# Altium PCB 3 motors 1 board.PcbDoc (part 2 of 2)
Units mil, origin at the board's own origin, x right, y up, seen from the top; angles counter-clockwise.
Board outline 3920 x 3290 mil, 4 copper layers (Top Layer, GND, PWR, Bottom Layer), stack 37.817 mil thick; 72 components, 81 nets, 316 pads, 112 vias.
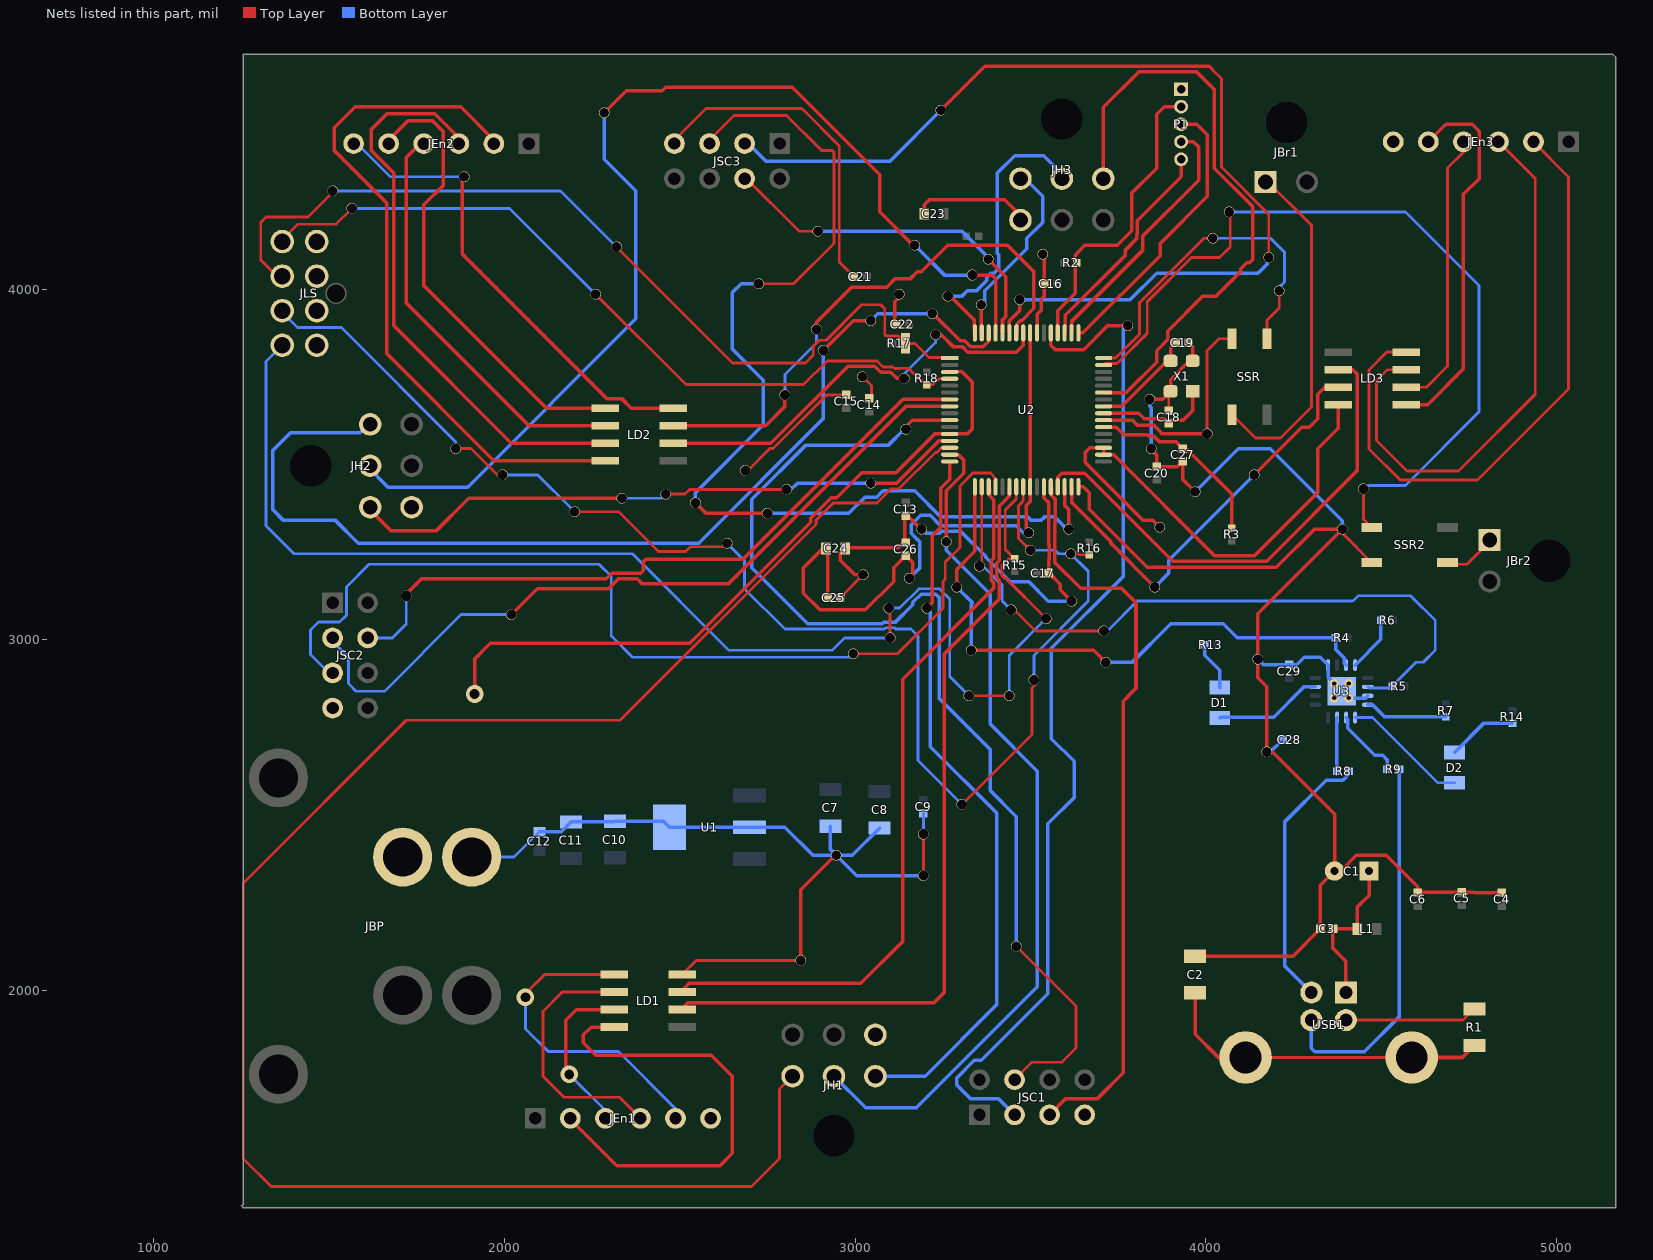
[diagram p4: the nets of this part, all layers, seen from the top]

## Via types
v1: diameter 30, hole 28, Top Layer to Bottom Layer, 107 vias
v2: diameter 50, hole 28, Top Layer to Bottom Layer, 4 vias
v3: diameter 30, hole 30, Top Layer to Bottom Layer, 1 vias

## Nets (pads, with @x,y where several pads share a name; then routed paths per layer and width w, separated by ;. In a path a pad name is that pad's centre, name@x,y a point inside that pad or via, vN(x,y) a via of type N, cw(c..) or ccw(c..) an arc to the next point about the centre after c; other vN are vias at no path point) (continued)
CF2M1: JSC1.3 U2.53 | length 2906
  Top Layer w10: U2.53@3558.39,3875 3558.39,3840.04 3571.57,3826.85 3651.85,3826.85 3720.86,3895.86 v1(3777.65,3895.86)
  Bottom Layer w10: JSC1.3@3455,1645 3410,1690 3330,1690 3290,1730 3290,1750 3340,1800 3360,1800 3550,1990 3550,2474.71 3625,2549.71 3625,2572.98 3624.77,2573.21 3624.77,2606.79 3625,2607.02 3625,2652.72 3560,2717.72 3560,2975 3765,3180 3765,3885
CF2M2: JSC2.3 U2.8 | length 2224.7
  Top Layer w10: v1(2019.87,3071.34) 2093.53,3145 2296.81,3145 2325.28,3173.47 2378.41,3173.47 2391.89,3160 2640,3160 3145,3665 U2.8@3270,3665
  Bottom Layer w8: JSC2.3@1500,3005 1555,2950 1555,2875 1577.33,2852.67 1657.67,2852.67 1876.34,3071.34 v1(2019.87,3071.34)
CF2M3: JSC3.3 U2.59 | length 2930.4
  Top Layer w8: 4020,4625 4045,4600 4045,4347.57 4180,4212.57 v1(4180,4090)
  Top Layer w10: v1(3245,4510) 3370,4635 4010,4635 4020,4625 ; U2.59@3440.28,3875 3440.28,3908.91 3470,3938.63 v1(3470,3970)
  Bottom Layer w10: JSC3.3@2685,4425 2745,4365 3100,4365 v1(3245,4510) ; v1@3480,3970 3785,3970 3860,4045 4149.21,4045 4175,4070.79 v1@4175,4080
CF3M1: JSC1.4 U2.10 | length 3186.1
  Top Layer w8: JSC1.4@3455,1745 3505,1795 3590,1795 3630,1835 3630,1955 v1(3460,2125)
  Top Layer w10: v1(3145,3600) 3155,3600 3150,3605 3146.3,3608.7 3163.58,3625.98 U2.10@3270,3625.98
  Bottom Layer w10: v1(3145,3600) 3145,3590 3140,3595 3137.8,3597.2 3095.6,3555 2860,3555 2705,3400 2705,3205 2865,3045 3077.77,3045 3081.77,3049 3114,3049 3165,3100 3165,3106.57 3188.43,3130 3230,3130 3240.84,3119.16 3240.84,2831.37 3385.47,2686.73 3385.47,2569.82 3460,2495.29 v1(3460,2125)
CF3M2: JSC2.4 U2.7 | length 2016
  Top Layer w10: v3@1717.5,3127.5 1763.47,3173.47 2290.49,3173.47 2306.49,3189.47 2385.04,3189.47 2386.78,3187.73 2395.53,3196.48 2395.53,3221.34 2404.18,3230 2681.37,3230 3136.37,3685 3175,3685 ; 3175.04,3685.04 U2.7@3270,3685.04
  Bottom Layer w8: JSC2.4@1600,3005 1680,3005 1720,3045 v3(1720,3125)
CF3M3: JSC3.4 U2.60 | length 1014.3
  Top Layer w8: JSC3.4@2682.5,4322.5 2840,4165 v1(2894.2,4165)
  Top Layer w10: v1(3380,4085) 3430,4035 3430,3921.26 3420.59,3911.85 U2.60@3420.59,3875
  Bottom Layer w10: v1(2894.2,4165) 3305,4165 3370,4100
CLK1_A: JEn1.4 LD1.6 | length 738.5
  Top Layer w8: LD1.6@2313,1995 2165,1995 2110,1940 2110,1755 2170,1695 2328,1695 JEn1.4@2388,1635
CLK1_B: JEn2.4 LD2.6 | length 1198.7
  Top Layer w10: JEn2.4@1770,4425 1720,4375 1720,3960 2070,3610 LD2.6@2288,3610
CLK1_C: JEn3.4 LD3.6 | length 801.5
  Top Layer w8: LD3.6@4572,3720 4630,3720 4690,3780 4690,4345 4735,4390 JEn3.4@4735,4420
CLK2_A: JEn1.5 LD1.5 | length 922.3
  Top Layer w8: v2@2055,1985 2115,2045 LD1.5@2313,2045
  Bottom Layer w8: v2(2060,1980) 2060,1890 2125,1825 2325,1825 2488,1662 JEn1.5@2488,1635
CLK2_B: JEn2.5 LD2.5 | length 1316
  Top Layer w10: JEn2.5@1670,4425 1725,4480 1795,4480 1825,4450 1825,4295 1770,4240 1770,4010 2120,3660 LD2.5@2288,3660
CLK2_C: JEn3.5 LD3.5 | length 1075.9
  Top Layer w10: LD3.5@4572,3670 4633.04,3670 4735,3771.96 4735,4270 4780,4315 4780,4450 4760,4470 4685,4470 JEn3.5@4635,4420
CLK_A: LD1.3 U2.19 | length 2102.3
  Top Layer w10: LD1.3@2507,2000 2527,2020 3016.63,2020 3135.81,2139.19 3135.81,2887.53 3395,3146.72 3395,3162.92 3388.45,3169.47 3388.45,3225.09 3395,3231.64 3395,3399.32 3384,3410.32 3384,3432.02 U2.19@3380,3436.02
CLK_B: LD2.3 U2.58 | length 1542.5
  Top Layer w10: LD2.3@2482,3610 2745,3610 2800,3665 2800,3682.26 ; v1(2890,3885) 2890,3905 2990,4005 3090,4005 3115,4030 3158.1,4030 3177.42,4049.32 3188.64,4049.32 3264.32,4125 3435,4125 3510,4050 3510,3945 3475,3910 3470.98,3910 3470.98,3908.95 3462.74,3900.7 3462.74,3877.78 U2.58@3459.96,3875
  Bottom Layer w8: v1(2800,3698.11) 2800,3756.01 2890,3846.01 v1(2890,3885)
CLK_C: LD3.3 U2.31 | length 1212.8
  Top Layer w10: U2.31@3617.44,3436.02 3617.44,3391.89 3730,3279.33 3730,3275 v1(3855,3150) ; v1(4138.5,3470) 4274.5,3606 4295.71,3606 4320,3630.29 4320,3700 4340,3720 LD3.3@4378,3720
  Bottom Layer w8: v1@3850,3145 v1(3855,3150)
  Bottom Layer w10: v1(3855,3150) 3895,3190 3895,3226.5 v1(4138.5,3470)
DATA1_A: JEn1.2 LD1.8 | length 1337.7
  Top Layer w10: JEn1.2@2186.5,1633.5 2320,1500 2615,1500 2650,1535 2650,1755 2590,1815 2260,1815 2225,1850 2225,1872.83 2247.17,1895 LD1.8@2313,1895
DATA1_B: JEn2.2 LD2.8 | length 1975.7
  Top Layer w10: JEn2.2@1970,4425 1875,4520 1575,4520 1515,4460 1515,4395 1665,4245 1665,3815 1970,3510 LD2.8@2288,3510
DATA1_C: JEn3.2 LD3.8 | length 1812.3
  Top Layer w8: LD3.8@4572,3820 4516.54,3820 4466.1,3769.57 4466.1,3543.9 4555,3455 4775,3455 5035,3715 5035,4320 JEn3.2@4935,4420
DATA2_A: JEn1.3 LD1.7 | length 473.1
  Top Layer w10: v2@2175,1760 2175,1915 2205,1945 LD1.7@2313,1945
  Bottom Layer w8: v2(2185,1760) 2288,1657 JEn1.3@2288,1635
DATA2_B: JEn2.3 LD2.7 | length 1628
  Top Layer w10: JEn2.3@1871.56,4429.69 1801.25,4500 1665,4500 1620,4455 1620,4395 1685,4330 1685,3895 2020,3560 LD2.7@2288,3560
DATA2_C: JEn3.3 LD3.7 | length 1611.6
  Top Layer w8: LD3.7@4572,3770 4518.71,3770 4487.01,3738.3 4487.01,3567.99 4573.9,3481.1 4721.1,3481.1 4940,3700 4940,4315 JEn3.3@4835,4420
DATA_A: LD1.2 U2.22 | length 2291.7
  Top Layer w10: LD1.2@2507,1947.17 2524.83,1965 3225.67,1965 3254.41,1993.74 3255,1993.74 3255,2960 3411,3116 3411,3169.55 3404.45,3176.1 3404.45,3218.47 3411,3225.02 3411,3380.45 3440.28,3409.72 U2.22@3440.28,3436.02
DATA_B: LD2.2 U2.57 | length 1239.6
  Top Layer w10: LD2.2@2482,3560 2760,3560 2980,3780 3056.25,3780 3073.54,3762.72 3102.28,3762.72 3120,3745 v1(3140,3745) ; v1(3230,3870) 3245.46,3870 3279.4,3836.06 3305.79,3836.06 3321.81,3820.04 3450.04,3820.04 3450,3820 3459.65,3820 3479.65,3840 U2.57@3479.65,3875
  Bottom Layer w8: v1(3140,3745) 3140,3757.48 3230,3847.48 v1(3230,3870)
DATA_C: LD3.2 U2.29 | length 1432.1
  Top Layer w10: U2.29@3578.07,3436.02 3578.07,3463.07 3590,3475 3655,3475 3905,3225 3906,3224 4174,3224 4432.44,3482.44 4432.44,3757.56 4420,3770 LD3.2@4378,3770
DM: R8.1 USB1.2 | length 767.4
  Bottom Layer w10: USB1.2@4301.57,1993.74 4225,2070.32 4225,2480 4344.17,2599.17 4391.61,2599.17 4410,2617.57 R8.1@4410,2625
DP: R9.1 USB1.3 | length 1081.6
  Bottom Layer w10: USB1.3@4301.57,1915 4301.57,1835 4311.57,1825 4452.59,1825 4552.72,1925.12 R9.1@4552.72,2630
GND: C1.2 C2.1 C3.1 C4.1 C5.1 C6.1 C7.2 C8.2 C9.1 C10.2 C11.2 C12.2 C13.1 C14.1 C15.1 C16.1 C17.1 C18.1 C19.1 C20.1 C21.1 C22.1 C23.1 C24.1 C25.1 C26.1 C27.1 C28.1 C29.1 JBP.3 JBP.4 JEn1.6 JEn2.6 JEn3.6 JH1.4 JH2.4 JH3.4 JLS.1 JLS.2 JLS.3 JLS.4 JSC1.7 JSC2.7 JSC3.7 LD1.4 LD2.4 LD3.4 P1.1 R1.1 SSR2.2 SSR.2 U1.2 U1.4 U2.3 U2.12 U2.27 U2.32 U2.34 U2.35 U2.39 U2.55 U3.3 U3.13 U3.17 USB1.4 X1.2 X1.4 | length 16838.5
  Top Layer w8: JSC3.7@2485,4425 2575,4515 2848.25,4515 2955,4408.25 2955,4076.89 C21.1@2996.89,4035 ; LD1.4@2507,2045 2547,2085 v1(2845,2085) ; v1(2687.27,3482.88) 2694.53,3482.88 2756.65,3545 2766.21,3545 2919.32,3698.11 C15.1@2975,3698.11 ; C25.1@2958.11,3120 v1(3023.11,3185) ; C24.1@2972.56,3260 C24.1@2972.56,3262.2 ; v1(3021.03,3750) 3046.56,3724.47 3046.56,3694.67 C14.1@3040,3688.11 ; v1@3125.84,3975.89 v1(3125.84,3985) ; C13.1@3142.28,3350.12 C13.1@3152.76,3350.12 ; v1@3187.38,3315.5 v1(3190.25,3315.5) ; v1(3195.25,2327.06) v1(3195.25,2445.46) ; v1(3535.14,4099.07) v1@3540.28,4093.93 ; 3540,4054.72 3540.28,4055 ; U2.34@3708.98,3527.56 U2.34@3709.95,3526.59 ; C18.1@3895,3653.11 3895,3703.39 X1.4@3900,3708.39 ; v1(4004.1,3586.61) 4004.1,3824.1 4038.27,3858.27 SSR.2@4075,3858.27 ; v1(4174.03,2680) 4190,2680 ; v1(4390,3315) 4390,3303.46 SSR2.2@4473.46,3220 ; USB1.4@4400,1915 4734.06,1915 R1.1@4766.22,1947.17 ; C6.1@4605,2278.11 C6.1@4606.89,2280
  Top Layer w10: v1@1880,4320 1880,4100 2292.31,3687.69 2333.99,3687.69 2361.68,3660 LD2.4@2482,3660 ; v2(1915,2845) 1915,2945 1959.47,2989.47 2526.98,2989.47 2528.34,2990.84 ; 2529.05,2990.13 2873.66,3334.74 2873.66,3346.59 2931.76,3404.69 2947.88,3404.69 3019.19,3476 3031.92,3476 3032.57,3476.65 3057.43,3476.65 3058.08,3476 3116.81,3476 3227.43,3586.61 U2.12@3270,3586.61 3320.27,3586.61 3335,3601.34 3335,3733.7 3304.92,3763.78 U2.3@3270,3763.78 ; v1(2845,2085) 2845,2286.34 v1@2941.83,2383.17 ; C24.1@2972.56,3260 2958.11,3245.55 2958.11,3226.89 3000,3185 v1(3023.11,3185) ; C24.1@2972.56,3262.2 3123.33,3262.2 3142.28,3281.15 C13.1@3142.28,3350.12 ; C22.1@3113.78,3900 3113.78,3963.83 v1@3125.84,3975.89 ; C13.1@3152.76,3350.12 v1@3187.38,3315.5 ; C23.1@3197.44,4215 3197.44,4240.07 3212.37,4255 3426.89,4255 JH3.4@3480,4201.89 ; U2.55@3519.02,3875 3519.02,3927.94 3530.87,3939.79 3530.87,3970.67 3540,3979.8 3540,4054.72 ; U2.27@3538.7,3436.02 3538.7,3405 3553.11,3390.59 3553.11,3270.48 3553.5,3270.09 3553.5,3229.91 3553.11,3229.52 C17.1@3553.11,3190 3584.88,3158.23 3584.88,3142.59 v1(3617.47,3110) ; 3540.28,4055 v1@3540.28,4093.93 ; U2.32@3637.13,3436.02 3650.53,3436.02 3667.85,3418.71 3667.85,3372.22 3833.55,3206.52 4201.86,3206.52 4310.34,3315 v1(4390,3315) 4149.07,3074.07 v1(4149.07,2943.89) 4149.07,2891.08 4174,2866.15 v1(4174.03,2680) ; U2.39@3708.98,3625.98 3791.54,3625.98 3805.42,3612.1 3851.89,3612.1 3873.38,3590.61 ; v1(3840,3685) 3876.61,3685 X1.4@3895,3703.39 ; v1@3849.19,3537.4 3860,3526.59 C20.1@3860,3493.11 3919.33,3493.11 C27.1@3935,3508.78 3935,3456.69 v1(3970,3421.69) ; v1(3869.02,3320.5) 3849.14,3340.38 3821.2,3340.38 3656.18,3505.39 3656.18,3533.9 3669.53,3547.24 U2.35@3708.98,3547.24 U2.34@3708.98,3527.56 3737.44,3527.56 4025,3240 4140.15,3240 4319.71,3419.56 4319.71,3544.71 4378,3603 LD3.4@4378,3670 ; 3872.8,3590.03 3876.21,3586.61 v1(4004.1,3586.61) ; X1.4@3900,3708.39 3900,3741.69 3953.31,3795 X1.2@3962.99,3795 3962.99,3835.62 C19.1@3951.22,3847.4 ; C2.1@3970,2097.17 4249.06,2097.17 C3.1@4326.89,2175 4326.89,2299.21 C1.2@4367.68,2340 ; 4190,2680 4367.68,2502.32 C1.2@4367.68,2340 ; C6.1@4605,2278.11 4605,2295 4515,2385 4430,2385 4385,2340 C1.2@4367.68,2340 ; C6.1@4606.89,2280 C5.1@4730,2280 4764.33,2280 4766.22,2278.11 C4.1@4845,2278.11
  Bottom Layer w8: JEn2.6@1570,4425 1675,4320 v1(1885,4320) ; JBP.3@1906.85,2380 2027.44,2380 C12.2@2100,2452.56 ; C10.2@2312.83,2480 C10.2@2315,2482.17 ; C9.1@3195,2505 3195,2455.25 v1@3195.25,2455 ; v1(3535.14,4099.07) 3537.09,4099.07 v1@3543.89,4105.86 ; v1@3835,3690 v1(3840,3685) ; v1(4174.03,2680) v1@4185,2680
  Bottom Layer w10: C12.2@2100,2452.56 2162.56,2452.56 C11.2@2190,2480 C10.2@2312.83,2480 ; C10.2@2315,2482.17 2453.66,2482.17 U1.4@2470.83,2465 U1.2@2699.17,2465 2800,2465 2880,2385 v1(2946.61,2385) ; C7.2@2930,2467.83 2930,2401.61 v1(2946.61,2385) ; C8.2@3070,2462.83 2992.17,2385 v1(2946.61,2385) ; v1(3190.25,3315.5) 3202.19,3303.55 3241.79,3303.55 3247.57,3309.33 3300.67,3309.33 3372.43,3237.57 3372.43,3235 3442.43,3165 3496.15,3165 3551.15,3110 v1(3617.47,3110) ; v1(3195.25,2327.06) 3004.55,2327.06 v1(2946.61,2385) ; v1(3840,3685) 3840,3666.85 3845,3661.85 v1(3845,3545) ; v1(3970,3421.69) 4093.31,3545 4184.6,3545 4390,3339.6 v1(4390,3315) ; v1(4149.07,2943.89) 4164.86,2928.11 C29.1@4238.11,2928.11 4259.6,2928.11 4281.25,2949.77 4327.11,2949.77 U3.13@4349.4,2927.47 4349.4,2892.21 U3.17@4366.61,2875 ; v1@4185,2680 C28.1@4220,2715 ; U3.17@4408.11,2833.27 4455.99,2833.27 U3.3@4462.59,2839.87
H1M1: JH1.3 U2.16 | length 2087.9
  Top Layer w10: v1(3205,3090) 3220.29,3105.29 3220.29,3262.47 3220,3262.76 3220,3295.9 3244,3319.9 3244,3431.63 3270,3457.63 U2.16@3270,3506.65
  Bottom Layer w10: JH1.3@3058.11,1755.08 3200.08,1755.08 3404.39,1959.39 3404.39,2505.61 3215,2695 3215,3080 v1(3205,3090)
H1M2: JH2.3 U2.13 | length 1786
  Top Layer w8: v1(2460,3415) 2514.85,3415 2528.48,3428.63 v1(2804.93,3428.63)
  Top Layer w10: JH2.3@1610.08,3376.89 1676.97,3310 1805,3310 1898.55,3403.55 v1@2340.55,3403.55 ; v1(3045,3446.65) 3119.21,3446.65 3239.49,3566.93 U2.13@3270,3566.93
  Bottom Layer w8: v1(2335,3403.36) 2448.36,3403.36 v1(2460,3415)
  Bottom Layer w10: v1@2818.63,3428.63 2836.65,3446.65 v1(3045,3446.65)
H1M3: JH3.3 U2.63 | length 526.1
  Top Layer w10: U2.63@3360,3875 v1(3360,3955)
  Bottom Layer w10: v1@3370,3965 3370,3994.66 3490,4114.66 3490,4144.79 3535,4189.79 3535,4265 JH3.3@3480,4320
H2M1: JH1.2 U2.15 | length 2437.4
  Top Layer w10: v1(3260,3279.33) 3260,3425 3310,3475 3310,3512.5 3294.94,3527.56 U2.15@3270,3527.56
  Bottom Layer w10: JH1.2@2940,1755.08 3030.08,1665 3175,1665 3520,2010 3520,2625 3385.47,2759.53 3385.47,3129.53 3260,3255 v1(3260,3279.33)
H2M2: JH2.2 U2.61 | length 3189
  Top Layer w10: v1(2285,4502.57) 2347.43,4565 2449.85,4565 2459.85,4575 2821.21,4575 3070,4326.21 3070,4220 v1@3160,4130 ; v1(3335,4040) 3390,4040 3400.91,4029.09 U2.61@3400.91,3875
  Bottom Layer w10: JH2.2@1610,3493.11 1668.11,3435 1895,3435 2375,3915 2375,4280 2285,4370 v1(2285,4502.57) ; v1(3170,4125) 3255,4040 v1(3335,4040)
H2M3: JH3.2 U2.64 | length 839
  Top Layer w10: v1(3265,3980) 3271.85,3980 3340,3911.85 U2.64@3340,3875
  Bottom Layer w10: v1(3265,3980) 3305,3980 3320,3995 3346.57,3995 3375,4023.43 3375,4032.75 3387.25,4045 3396.44,4045 3410,4058.56 3410,4097.43 3405,4102.43 3405,4330 3455,4380 3538.11,4380 JH3.2@3598.11,4320 ; JH3.2@3600.31,4328.09 JH3.2@3604.07,4328.09
H3M1: JH1.1 U2.14 | length 5168.1
  Top Layer w8: JH1.1@2821.89,1755.08 2785,1718.19 2785,1520 2705,1440 1335,1440 1255,1520 1255,2305 1720,2770 2330.13,2770 2888.66,3328.53 2888.66,3340.38 2937.97,3389.69 3062.24,3389.69 3103.21,3430.65 3125.84,3430.65 3229.35,3534.17 3233.85,3534.17 3246.93,3547.24 U2.14@3270,3547.24
H3M2: JH2.1 U2.62 | length 3005
  Top Layer w10: v1(2910,3825) 2995,3910 v1(3045,3910) ; v1(3220,3930) 3222.44,3930 3300.39,3852.06 3312.42,3852.06 3328.43,3836.04 3366.19,3836.04 3381.22,3851.07 U2.62@3381.22,3875
  Bottom Layer w10: JH2.1@1610.08,3613.11 1586.97,3590 1390,3590 1340,3540 1340,3370 1370,3340 1518.43,3340 1583.43,3275 1715,3275 2554,3275 2910,3631 v1(2910,3825) ; v1(3045,3910) 3065,3930 v1(3220,3930)
H3M3: JH3.1 U2.43 | length 1728.3
  Top Layer w10: JH3.1@3708.11,4319.92 3708.11,4518.11 3809,4619 3975.1,4619 4025,4569.1 4025,4345 4135,4235 4135,4085 4125,4075 4117.57,4075 4100,4057.43 4100,4050 4030,3980 3991.73,3980 3891.8,3880.06 3891.8,3856.02 3860,3824.23 3860,3791.5 3773.22,3704.72 U2.43@3708.98,3704.72
NetD1_1: D1.1 R13.1 | length 139.4
  Bottom Layer w10: R13.1@3997.28,2985 3997.28,2955.43 4040,2912.72 D1.1@4040,2863.31
NetD2_1: D2.1 R14.1 | length 199.8
  Bottom Layer w10: D2.1@4710,2678.31 4793.98,2762.28 R14.1@4875,2762.28
NetJLS_5: 
NetJLS_6: 
NetJLS_7: 
NetJLS_8: 
NetR6_1: R6.1 U3.16 | length 157.9
  Bottom Layer w10: U3.16@4426.18,2927.47 4499.57,3000.86 R6.1@4499.57,3055
NetR7_1: R7.1 U3.4 | length 236.8
  Bottom Layer w10: U3.4@4462.59,2814.28 4475.72,2814.28 4510.43,2779.57 R7.1@4685,2779.57
NetR8_2: R8.2 U3.7 | length 153
  Bottom Layer w10: R8.2@4374.57,2625 4374.57,2777.44 U3.7@4375,2777.87
NetR9_2: R9.2 U3.6 | length 209.6
  Bottom Layer w10: U3.6@4400.59,2777.87 4405.27,2773.18 4405.27,2746.93 4482.2,2670 4505,2670 4517.28,2657.72 R9.2@4517.28,2630
NO1: JLS.8 R15.1 U2.23 | length 3906.8
  Top Layer w8: v1(3100,3005) 3100,3071.34 ; v1(3325,2839.87) v1(3439.87,2839.87) ; U2.23@3459.96,3436.02 3459.96,3401.09 3428.54,3369.67 3428.54,3256.93 R15.1@3455,3230.47 3437.67,3230.47 3419.45,3212.25 3419.45,3182.31 3425.31,3176.46 3428.54,3176.46 v1(3545,3060)
  Bottom Layer w8: JLS.8@1366.57,3840 1320,3793.43 1320,3325 1400,3245 2365,3245 2640.47,2969.53 2934.53,2969.53 2970,3005 v1(3100,3005) ; v1(3096.68,3090) 3127.22,3090 3182.22,3145 3240.84,3145 3270,3115.84 3270,2894.87 v1(3325,2839.87) ; v1(3439.87,2839.87) 3439.87,2954.87 v1(3545,3060)
NO2: JLS.7 R16.1 U2.24 | length 4035.9
  Top Layer w8: v1(1861.34,3545) 1905,3545 v1@1985,3465 ; v1(2200,3365) 2325,3365 2439,3251 2517.01,3251 2531.01,3265 v1@2635,3265 ; v1(3305,2530) 3505,2730 3505,2862.53 v1@3516.24,2873.76 ; U2.24@3479.65,3436.02 3479.65,3395.51 3466,3381.86 3466,3289 v1(3500,3255) ; v1(3615,3245) 3637.68,3245 3640.39,3242.28 R16.1@3667.72,3242.28
  Bottom Layer w8: JLS.7@1364.07,3935.93 1410,3890 1535,3890 1861.34,3563.66 v1(1861.34,3545) ; v1(1995,3470) 2095,3470 v1@2190,3375 ; v1(2635,3275) 2685,3225 2685,3145 2800,3030 3083.99,3030 3087.99,3034 3112.01,3034 3116.01,3030 3160,3030 3180,3010 3180,2655 v1(3305,2530) ; v1(3500,3255) 3570,3255 3580,3245 v1(3615,3245) 3665,3195 3665,3110 3510,2955 v1(3510,2885)
NO3: JLS.6 R17.1 U2.1 | length 2599.1
  Top Layer w8: JLS.6@1371.57,4016.57 1305,4083.15 1305,4190 1320,4205 1440,4205 1510,4275 v1(1510,4280) ; v1(2320,4120) 2650.8,3789.2 2858.25,3789.2 2881,3811.95 2881,3837.01 2897.99,3854 2917.79,3854 3018.79,3955 3073.54,3955 3085,3943.54 3085,3870 3089.17,3865.83 3123.09,3865.83 3143.55,3845.36 R17.1@3143.55,3845 3171.27,3845 3211.21,3805.06 3268.09,3805.06 U2.1@3270,3803.15
  Bottom Layer w8: v1(1510,4280) 2160,4280 v1(2320,4120)
NO4: JLS.5 R18.1 U2.4 | length 2219.2
  Top Layer w8: JLS.5@1361.57,4135.28 1411.3,4185 1520,4185 v1(1565,4230) ; v1(2260,3985) 2517.72,3727.28 2853.3,3727.28 2921.01,3795 3062.47,3795 3079.75,3777.72 3108.5,3777.72 3112.57,3773.65 3127.64,3773.65 3127.99,3774 3152.01,3774 3167.02,3758.99 3170,3758.99 3201.7,3727.28 3222.36,3727.28 3239.17,3744.09 U2.4@3270,3744.09
  Bottom Layer w8: v1(1565,4230) 2015,4230 v1(2260,3985)
OSC0: C18.2 U2.40 X1.1 | length 336
  Top Layer w10: U2.40@3708.98,3645.67 3809.33,3645.67 3825.09,3629.91 3881.98,3629.91 C18.2@3895,3616.89 3904.02,3625.91 3935.5,3625.91 3962.99,3653.4 X1.1@3962.99,3708.39
OSC1: C19.2 U2.41 X1.3 | length 303.3
  Top Layer w10: U2.41@3708.98,3665.35 3760.35,3665.35 3890,3795 X1.3@3900,3795 3900,3832.4 C19.2@3915,3847.4
PWM1: JSC1.5 U2.28 | length 2115.4
  Top Layer w10: JSC1.5@3555,1645 3600,1690 3690,1690 3765.29,1765.29 3765.29,2824.13 3778.37,2837.2 3778.37,2838.37 3801.33,2861.33 3801.33,3105.38 3760,3146.72 3643.28,3146.72 3570,3220 3570,3331.57 3571.57,3333.14 3571.57,3399.91 3561.17,3410.32 3561.17,3434.86 U2.28@3560,3436.02
PWM2: JSC2.5 U2.20 | length 2842.4
  Top Layer w8: v1(2995,2960) 3121.85,2960 3251,3089.15 3251,3166.15 3257.44,3172.6 3257.44,3221.62 3299,3263.18 3299,3438.42 3335.58,3475 3385.91,3475 3400.91,3460 U2.20@3400.91,3436.02
  Bottom Layer w8: JSC2.5@1500,2905 1447.22,2957.78 1447.22,3027.48 1469.75,3050 1530,3050 1549.53,3069.53 1549.53,3150.39 1614.14,3215 2270,3215 2305,3180 2305,3010 2365,2950 v1@2985,2950
PWM3: JSC3.5 U2.30 | length 3030.2
  Top Layer w8: JSC3.5@2585,4425 2655,4495 2805,4495 2905,4395 2935,4395 2940,4390 2940,4130 2825,4015 v1(2725.04,4015)
  Top Layer w10: v1(2545,3390) 2575,3360 v1(2750,3360) ; U2.30@3597.44,3436.02 3597.44,3383.61 3610,3371.05 v1(3610,3315)
  Bottom Layer w10: v1(2545,3390) 2545,3418.9 2738.51,3612.41 2738.51,3740.32 2650,3828.83 2650,3990 2675,4015 v1@2720,4015 ; v1(2750,3360) 2981.78,3360 3028.43,3406.65 3061.57,3406.65 3079.91,3425 3170,3425 3245,3350 3492.57,3350 3502.57,3340 3530.21,3340 3540.21,3350 3570,3350 v1@3607.5,3312.5
RESET: C27.2 R3.2 U2.38 | length 542.2
  Top Layer w10: U2.38@3708.98,3606.3 3745.05,3606.3 3766.34,3585 3832.03,3585 3837.35,3579.68 3852.74,3579.68 3867.43,3565 3915,3565 C27.2@3935,3545 3944.4,3545 4075,3414.4 R3.2@4075,3317.72
SHIELD: C2.2 R1.2 USB1.5 USB1.6 | length 956
  Top Layer w8: USB1.6@4113.78,1808.31 USB1.5@4587.8,1808.31
  Top Layer w10: C2.2@3970,1992.83 3970,1875 4036.69,1808.31 USB1.6@4113.78,1808.31 ; USB1.5@4587.8,1808.31 4731.69,1808.31 R1.2@4766.22,1842.83
SSRIn: SSR.1 U2.48 | length 984.4
  Top Layer w8: U2.48@3708.98,3803.15 3743.15,3803.15 3811,3871 3811,3961 3995,4145 v1(4020,4145) ; SSR.1@4175,3858.27 4175,3911 4210,3946 v1(4210,3995)
  Bottom Layer w8: v1(4020,4145) 4185,4145 4225,4105 4225,4020 v1@4210,4005
SSRIn2: SSR2.1 U2.47 | length 2336.7
  Top Layer w8: U2.47@3708.98,3783.46 3712.76,3787.24 3747.04,3787.24 3833.55,3873.75 3833.55,3963.55 3960,4090 4040,4090 4070,4120 v1@4070,4220 ; v1(4450,3430) 4450,3343.46 SSR2.1@4473.46,3320
  Bottom Layer w8: v1(4067.39,4220) 4570,4220 4780,4010 4780,3650 4570,3440 4462.59,3440
SSROut: JBr1.1 SSR.3 | length 994
  Top Layer w8: SSR.3@4075,3641.73 4141.73,3575 4213.11,3575 4301.57,3663.46 4301.57,4181.86 JBr1.1@4170.94,4312.49
SSROut2: JBr2.1 SSR2.3 | length 125.3
  Top Layer w8: SSR2.3@4718.27,3215 4745.87,3215 JBr2.1@4814.92,3284.06
TCK: P1.2 R2.2 U2.52 | length 868.2
  Top Layer w10: U2.52@3578.07,3879.65 3578.07,3938.07 3627.72,3987.72 3627.72,4095.51 3631.83,4099.62 3631.83,4101.39 3655.43,4125 3747.56,4125 3789,4166.44 3789,4274 3860,4345 3860,4498.02 3881.98,4520 P1.2@3930,4520
TDI: P1.4 U2.50 | length 736.4
  Top Layer w10: U2.50@3617.44,3875 3617.44,3907.44 3820,4110 3820,4150 3980,4310 3980,4405 3965,4420 P1.4@3930,4420
TDO: P1.3 U2.49 | length 812.3
  Top Layer w10: U2.49@3637.13,3875 3650,3875 3870,4095 3870,4130 4005,4265 4005,4440 3975,4470 P1.3@3930,4470
TMS: P1.5 U2.51 | length 631.7
  Top Layer w10: U2.51@3600,3875 3600,3925 3770,4095 3770,4110 3804,4144 3804,4156.63 3805,4157.63 3805,4195 3930,4320 P1.5@3930,4370
"USB RX LED": D2.2 U3.5 | length 360.9
  Bottom Layer w8: U3.5@4426.18,2777.87 4476.11,2777.87 4662.28,2591.69 D2.2@4710,2591.69
"USB TX LED": D1.2 U3.11 | length 309.8
  Bottom Layer w10: D1.2@4040,2776.69 4042.5,2779.19 4194.19,2779.19 4280.46,2865.46 U3.11@4312.99,2865.46
USB_RX: R4.1 U2.17 U3.15 | length 1708.6
  Top Layer w10: v1(3290,3150) 3290,3200 3341.85,3251.85 U2.17@3341.85,3436.02 ; v1(3331.45,2969.38) 3680.62,2969.38 v1(3715,2935)
  Bottom Layer w10: v1(3290,3150) 3335,3105 3331.45,3101.45 v1(3331.45,2969.38) ; v1@3720,2935 3790,2935 3900,3045 4050,3045 4090,3005 R4.1@4370.39,3005 4370.39,2972.47 4395.9,2946.96 4395.9,2932.16 U3.15@4400.59,2927.47
USB_TX: R5.1 U2.18 U3.2 | length 2029.8
  Top Layer w8: v1(3355,3210) 3361.54,3216.54 U2.18@3361.54,3436.02 ; v1@3445,3095 3515,3025 v1(3710,3025)
  Bottom Layer w8: v1(3355,3210) 3365,3210 3420,3155 3420,3110 v1(3445,3085) ; v1(3710,3025) 3720,3025 3805,3110 4420,3110 4435,3125 4585,3125 4655,3055 4655,2970 4620.49,2935.49 4600.12,2935.49 4553.11,2888.48 4552.75,2888.48 4546.89,2882.62 4546.89,2882.26 R5.1@4532.28,2867.65 4526.92,2862.28 4465.77,2862.28 U3.2@4462.59,2865.46
VBUS: C1.1 C3.2 L1.1 USB1.1 | length 444.8
  Top Layer w10: USB1.1@4400,1993.74 4400,2083.11 4363.11,2120 C3.2@4363.11,2175 L1.1@4432.44,2175 4432.44,2237.44 4466.1,2271.1 C1.1@4466.1,2340
VCORE: C24.2 C25.2 C26.2 U2.25 U2.56 | length 1882.2
  Top Layer w10: C25.2@2921.89,3120 2921.89,3255.55 C24.2@2917.44,3260 2908.19,3260 2852.73,3204.53 2852.73,3132.27 2900,3085 3029.43,3085 3110,3165.57 3110,3205 C26.2@3145,3240 3165,3220 3165,3185 v1(3155,3175) ; v1(3495,3305) 3489.02,3310.98 3489.02,3383.66 3499.33,3393.98 U2.25@3499.33,3436.02 U2.56@3499.33,3875
  Bottom Layer w10: v1(3155,3175) 3184.23,3204.23 3184.23,3279.73 3178.47,3285.5 3177.82,3285.5 3160.25,3303.07 3160.25,3327.93 3187.32,3355 3214.02,3355 3243.69,3325.33 3459.67,3325.33 v1@3480,3305
pads on no net: JBP.MH1 JBP.MH2 JBr1. JBr1.2 JBr2. JBr2.2 JH1.6 JH1.7 JH2.6 JH2.7 JH3.6 JH3.7 JLS.9 JSC1.8 JSC2.8 JSC3.8 U2.5 U2.21 U2.33 U2.36 U2.45 U2.46 U3.12 U3.14

## Polygon pours and split planes (outlines as drawn)
no net on Bottom Layer "Bottom Layer-No Net" (solid, pour order 38): 4085,2655
+24V on PWR "PWR-+24V 5" (solid, pour order 87): 4416.45,3475 4960,3475 4970,3485 4970,3135 4416.45,3135
+A3.3V on PWR "PWR-+A3.3V" (solid, pour order 75): 2966.91,4288.07 2966.91,3938.07 3436.91,3938.07 3436.91,4288.07
+5V on PWR "PWR-+5V 5" (solid, pour order 111): 2020,1872.83 2020,1525 2660,1525 2665,1530 2665,1872.83
+5V on PWR "PWR-+5V" (solid, pour order 99): 3660,2920 3660,1830.08 2020,1829.93 2020,2920
+24V on PWR "PWR-+24V 1" (solid, pour order 69): 1255,2300 1607.41,2300 1690.25,2382.84 1690.25,3087.95 1554.1,3224.1 1535,3205 1255,3205
+3.3V on PWR "+3.3V_L03_P058" (solid, pour order 58): 3141.74,3909.15 3224.36,3909.15 3270.96,3909.15 3317.56,3909.15 4040,3909.15 4040,3155 2840,3155 2840,3909.15
+5V on PWR "PWR-+5V 1" (solid, pour order 101): 2165,4230 2595.32,4230 2595.32,2908.02 2165,2908.02
+5V on PWR "PWR-+5V 2" (solid, pour order 107): 5103.02,2440 5100,2443.02 5100,4502.57 4480,4502.57 4485,4497.57 4485,4360 4975,4360 5015,4320 5015,2145 5103.02,2145
+5V on PWR "PWR-+5V 3" (solid, pour order 105): 3565,2165 3605,2205 5135,2205 5135,1875 5090.08,1830.08 3617.47,1830.08 3617.47,2107.78 3560.25,2165
+5V on PWR "PWR-+5V 4" (solid, pour order 103): 1495,4490 2236.45,4490 2236.45,4115 1795,4115 1795,4210 1675,4330 1495,4330
+3.3V on PWR "PWR-+3.3V" (solid, pour order 97): 3814.51,3219.5 3814.51,3025 4040,3025 4040,3219.5
+3.3V on PWR "PWR-+3.3V 1" (solid, pour order 95): 3814.51,3080 4965.38,3080 4965.38,2485 3825,2485 3820,2490 3814.51,2490
+24V on PWR "PWR-+24V 2" (solid, pour order 93): 4460,3135 4289.75,3135 4210,3214.75 4210,3905 4230,3925 4279.15,3925 4300,3904.15 4300,3224.51 4460,3224.51
+24V on PWR "PWR-+24V 3" (solid, pour order 91): 4403.67,4412.03 4403.67,4318.67 4467.35,4255 4730,4255 4800,4185 4800,3445 4870,3445 4890,3465 4858.55,3496.45 4858.55,4320 4495.71,4320
+24V on PWR "PWR-+24V 4" (solid, pour order 89): 4470,4665 4470,4315 4405,4315 4405,4370 4405,4620 2855,4620 2850,4615 2850,4665
+24V on PWR "PWR-+24V 6" (solid, pour order 79): 2325,4540 2380,4485 2380,4250 2839.45,4244.45 2899.75,4304.75 2899.75,4665 1265,4665 1265,4540
+24V on PWR "PWR-+24V 7" (solid, pour order 77): 1309.46,3157.05 1310,3157.6 1310,4665 1255,4665 1255,4570 1255,3162.5
+24V on PWR "PWR-+24V" (solid, pour order 71): 1255,2265 1255,1435 1290,1400 3800,1400 3800,1800 3189.12,1800 2966.76,1485 2005,1485 2005,2265
GND on GND (split plane): 5149.9,1400.1 1275.1,1400.1 1275.1,4649.9 5149.9,4649.9

## Text inside footprints (layer, text, board x,y; h text height)
C1: Top Overlay "+" at 4515.35,2401.54 h70
JSC1: Top Overlay "8" at 3715,1725 h50; Top Overlay "7" at 3715,1625 h50; Top Overlay "1" at 3275,1625 h50; Top Overlay "2" at 3275,1725 h50
JSC2: Top Overlay "8" at 1590,2745 h50 r270; Top Overlay "7" at 1490,2745 h50 r270; Top Overlay "1" at 1490,3185 h50 r270; Top Overlay "2" at 1590,3185 h50 r270
JSC3: Top Overlay "8" at 2425,4335 h50 r180; Top Overlay "7" at 2425,4435 h50 r180; Top Overlay "1" at 2865,4435 h50 r180; Top Overlay "2" at 2865,4335 h50 r180
LD1: Top Overlay "*" at 2529.5,1878 h50 r180; Mechanical 13 "*" at 2529.5,1878 h50 r180
LD2: Top Overlay "*" at 2504.5,3493 h50 r180; Mechanical 13 "*" at 2504.5,3493 h50 r180
LD3: Top Overlay "*" at 4355.5,3837 h50; Mechanical 13 "*" at 4355.5,3837 h50